# Altium PCB MCU_USB.PcbDoc
Units mil, origin at the board's own origin, x right, y up, seen from the top; angles counter-clockwise.
Board outline 1920.11 x 910.11 mil, 4 copper layers (Top Layer, VCC, GND, Bottom Layer), stack 30.634 mil thick; 36 components, 33 nets, 152 pads, 185 vias.
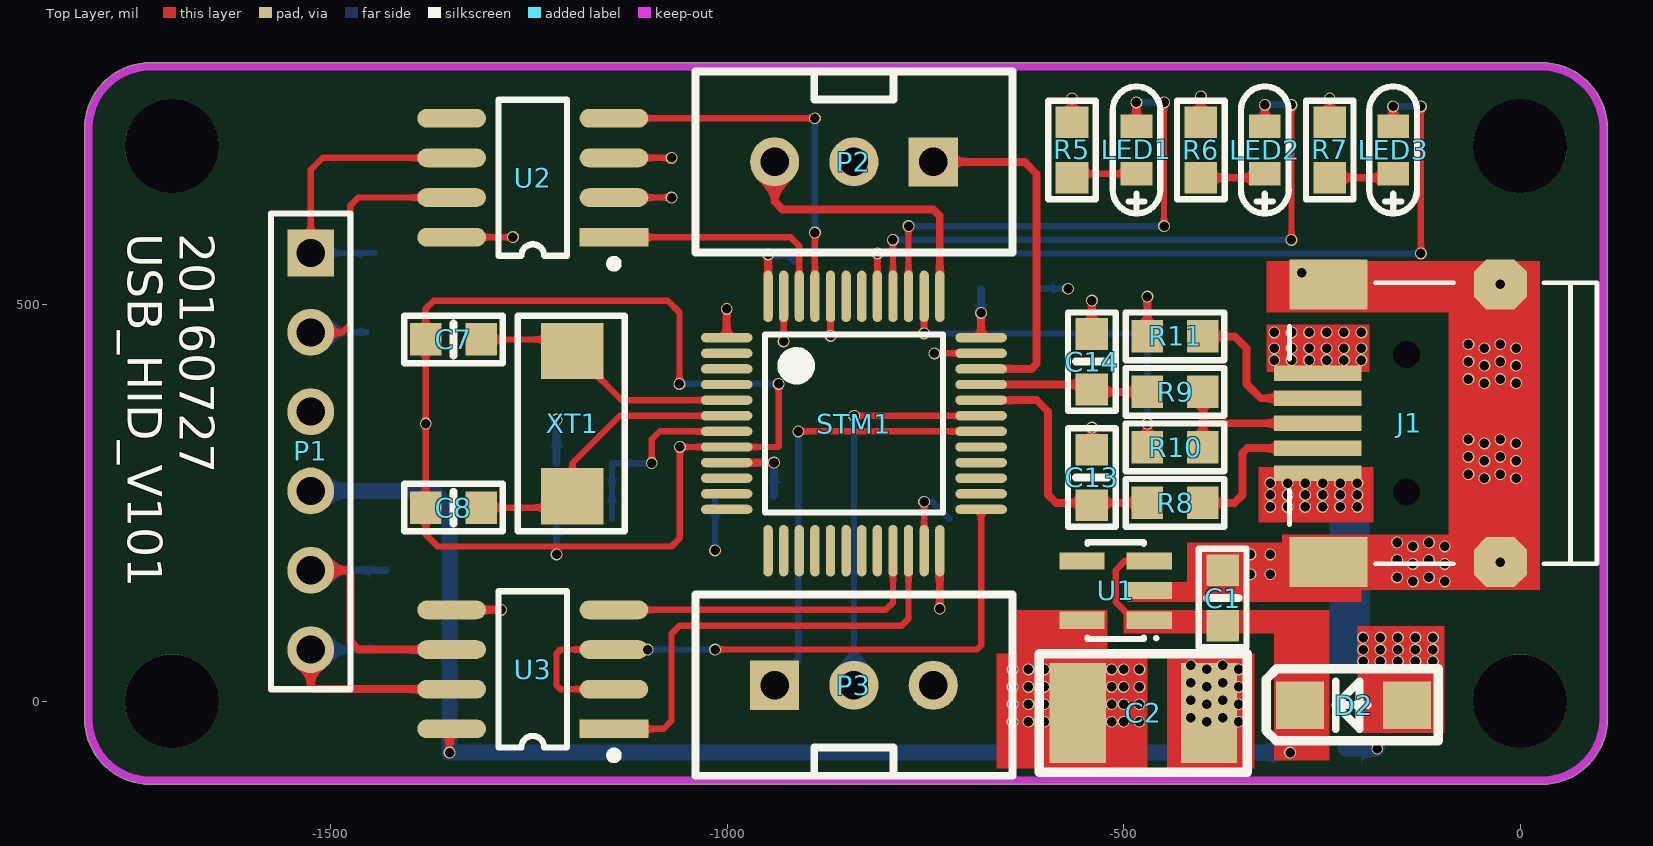
[diagram p0: Top Layer view]
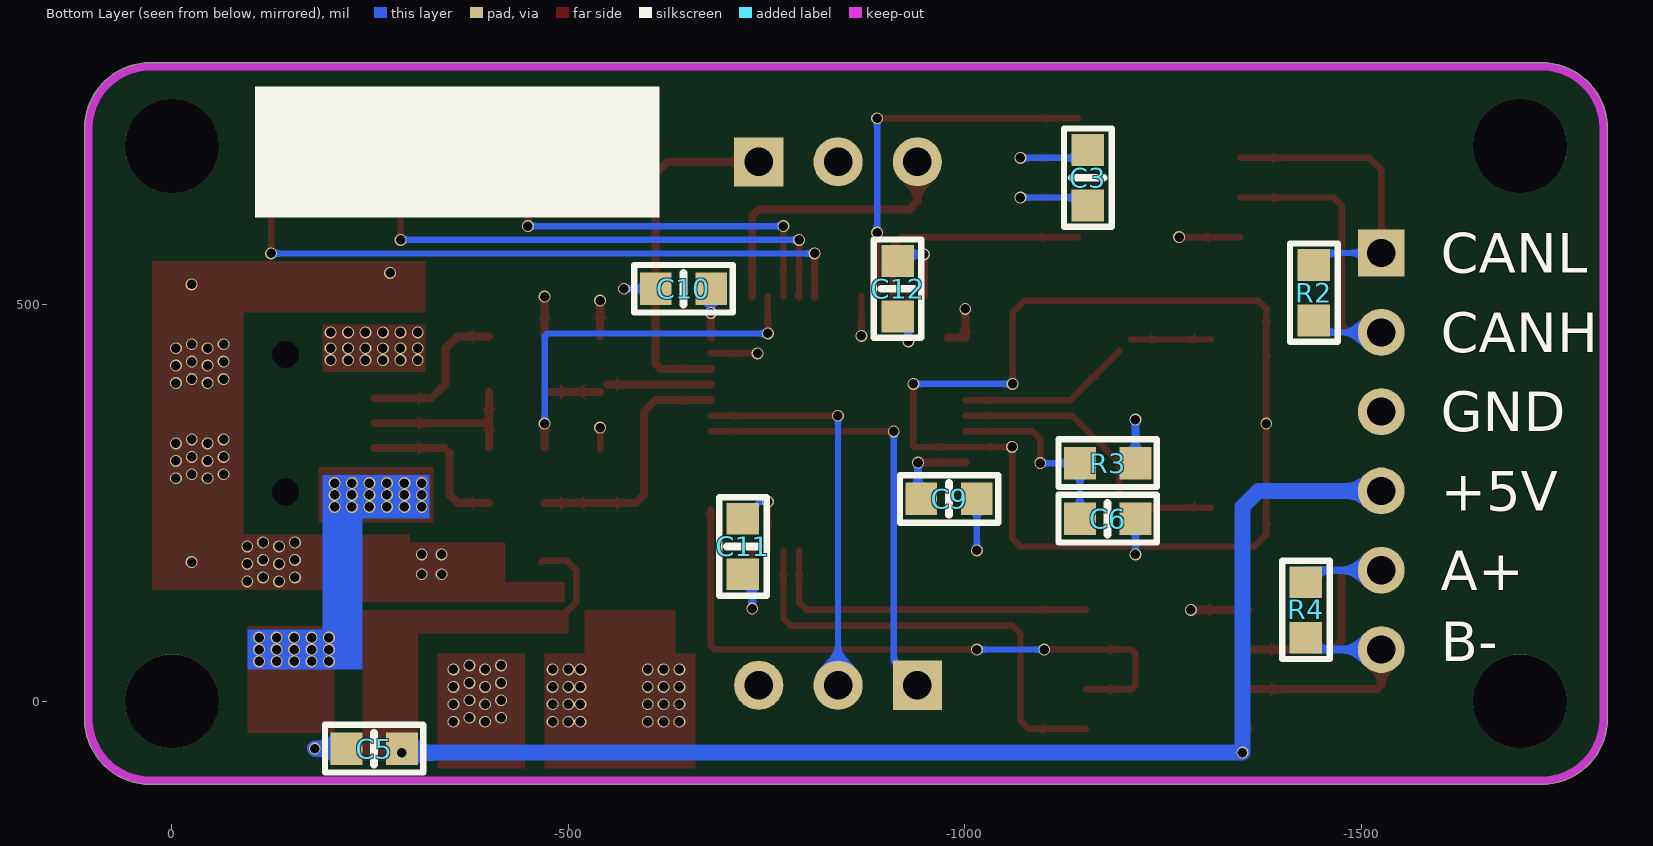
[diagram p1: Bottom Layer view, seen from below]
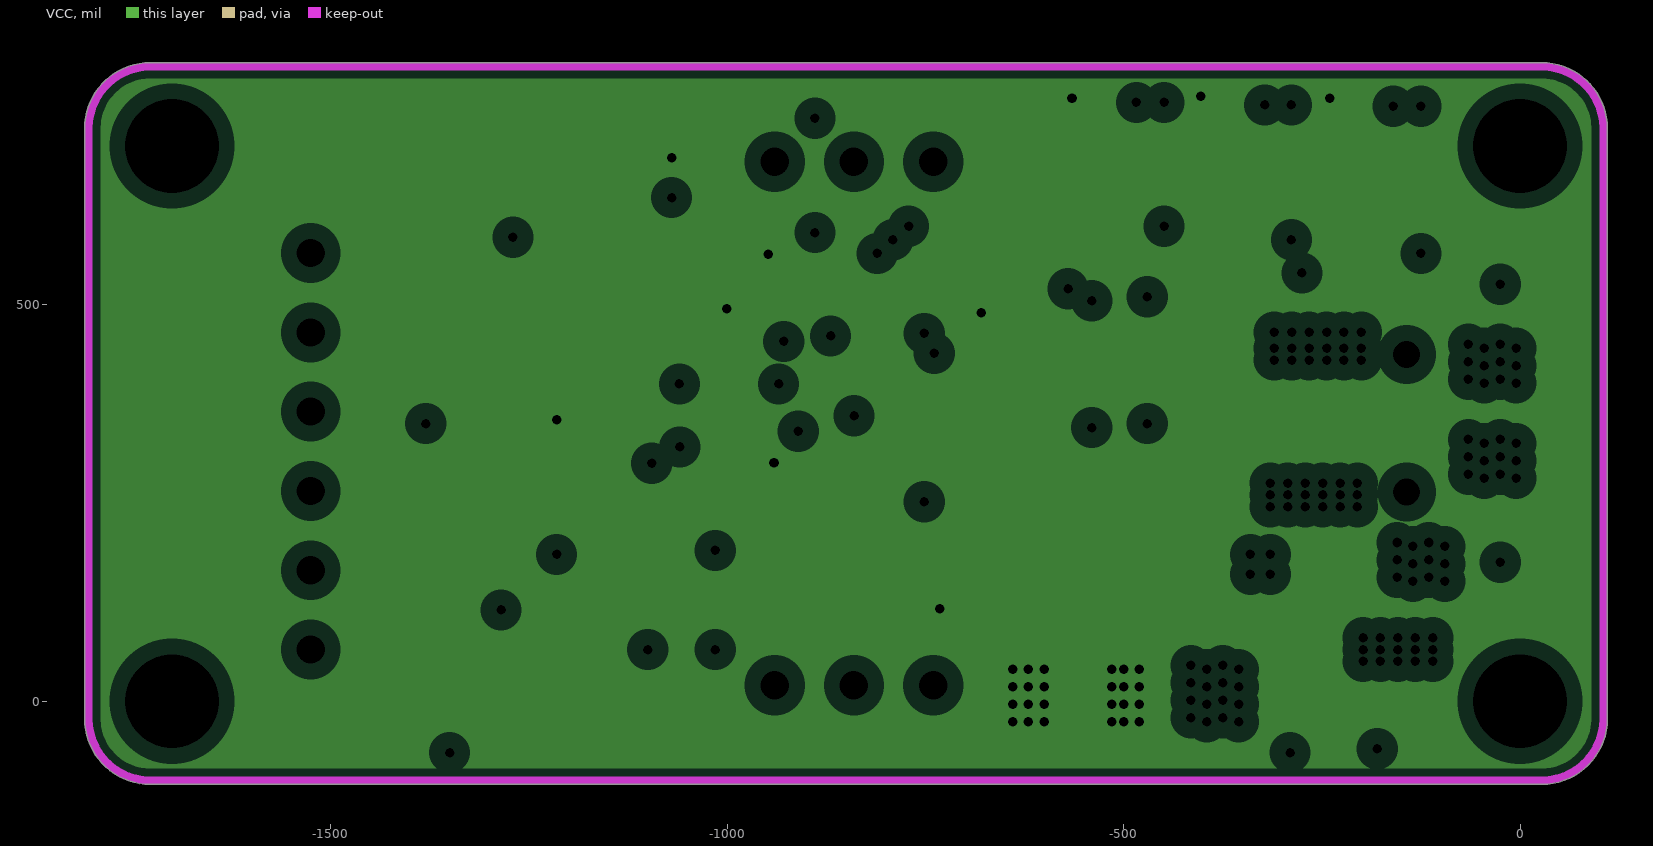
[diagram p2: VCC, clearances drawn from the general rule]
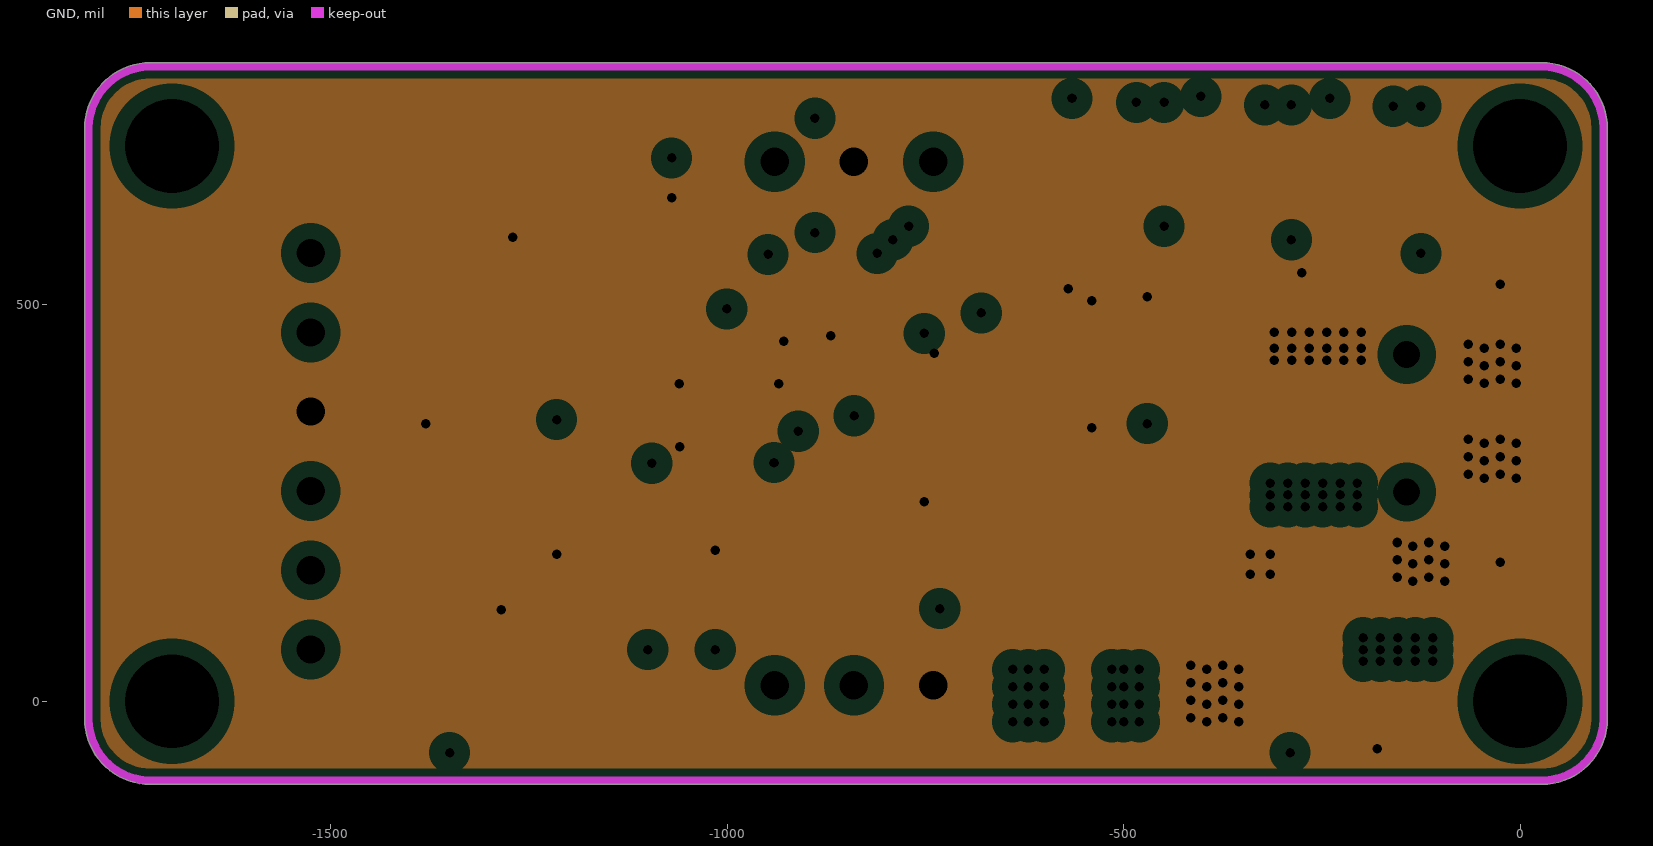
[diagram p3: GND, clearances drawn from the general rule]
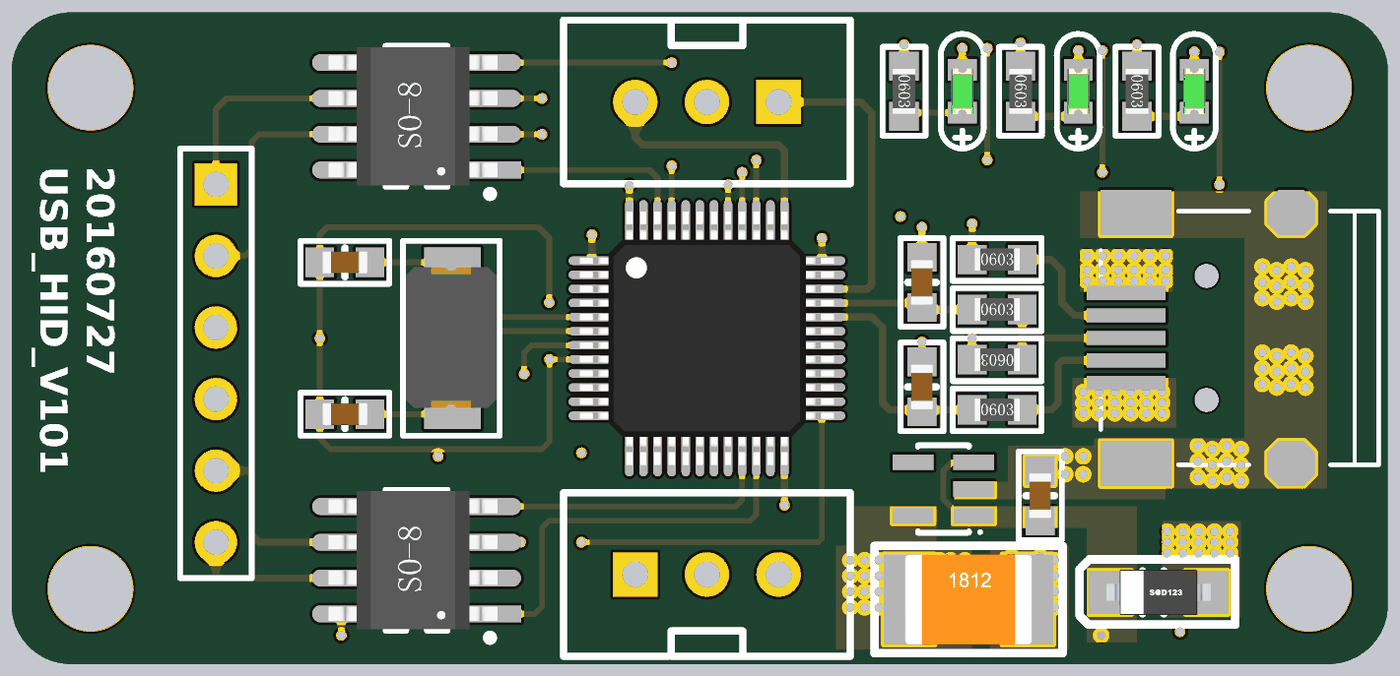
[diagram p4: 3D render of the assembled board from above, using the file's embedded part models]
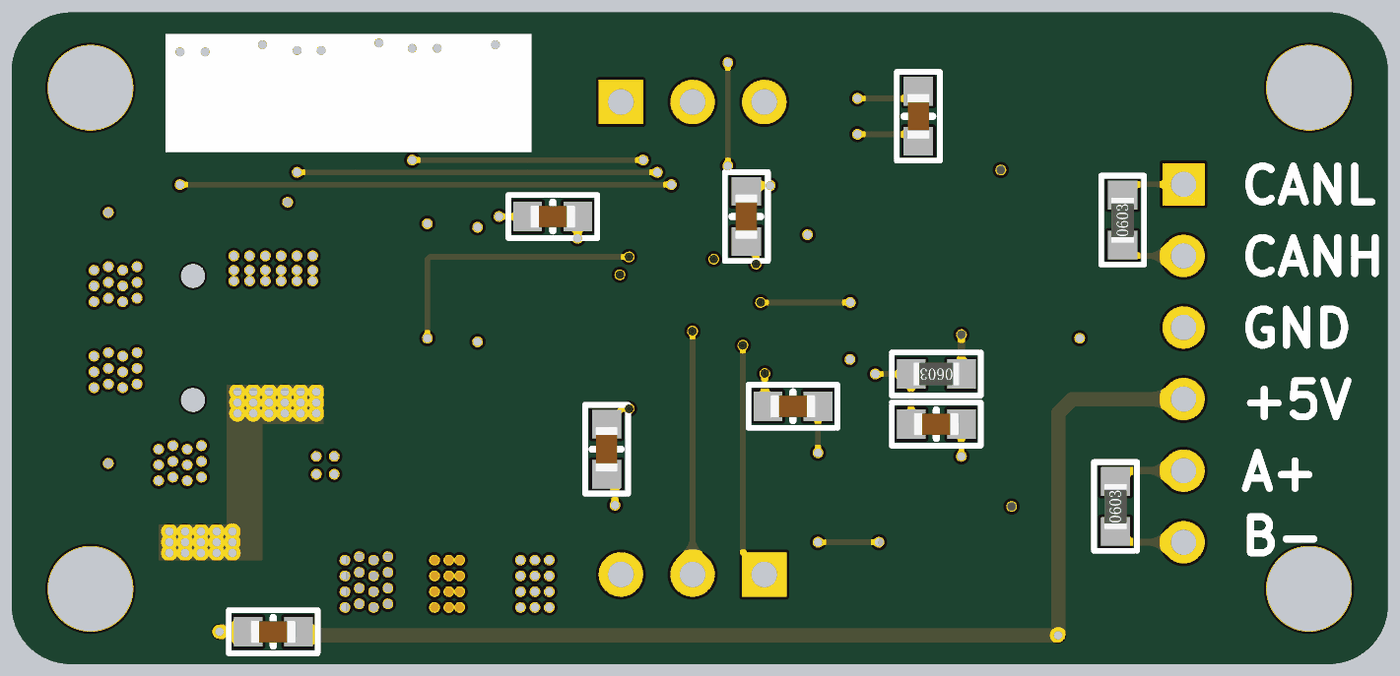
[diagram p5: 3D render of the assembled board from below, using the file's embedded part models]

## Layer stack, top to bottom
Top Solder: solder mask 0.4, Solder Resist, Dk 3.5
Top Layer: signal copper 1.4
Dielectric 1: core 10, FR-4, Dk 4.2
VCC: plane copper 1.417, net VCC_+3.3V
Dielectric 3: prepreg 5, Dk 4.2
GND: plane copper 1.417, net GND
Dielectric 2: core 10, Dk 4.2
Bottom Layer: signal copper 1.4
Bottom Solder: solder mask 0.4, Solder Resist, Dk 3.5

## Board outline
-1810.06,-22.5 cw(c-1805.04,-22.5) -1809.88,-21.17 cw(c-1805,-20) -1810.02,-20 -1810.02,721.86 cw(c-1805.04,722.5) -1810.06,722.5 cw(c-1727.5,722.5) -1727.5,805.06 cw(c-1727.5,800.04) -1726.87,805.02 27.5,805.02 cw(c27.5,722.46) 110.06,722.46 cw(c105.04,722.46) 110.01,721.83 110.01,-22.5 cw(c105,-22.5) 110.01,-22.53 ccw(c27.46,-22.5) 110.01,-22.5 110.01,-22.53 cw(c27.46,-22.5) 27.46,-105.06 cw(c27.46,-100.04) 26.83,-105.01 -1726.87,-105.01 cw(c-1727.5,-100.04) -1727.5,-105.06 cw(c-1727.5,-22.5)

## Design rules (kind name [scope] priority, off if disabled: settings)
Clearance [All] p1 off: gap=10
ComponentClearance [All] p1: gap=0 collisioncheckmode=3 verticalgap=0 showdistances=FALSE
HoleSize [All] p1: absolutevalues=TRUE maxlimit=500 minlimit=1 maxpercent=80.000 minpercent=20.000
HoleToHoleClearance [All] p1: gap=0 allowstackedmicrovias=TRUE
MinimumSolderMaskSliver [All] p1: minsoldermaskwidth=0
PlaneClearance [All] p1: clearance=20
PlaneConnect [All] p1: planeconnectstyle=Direct reliefexpansion=20 reliefentries=4 reliefconductorwidth=10 reliefairgap=10
PolygonConnect PolygonConnect_1 [IsVia vs InNet('GND')] p1 off: connectstyle=Direct reliefconductorwidth=10 reliefentries=4 polygonreliefangle="90 Angle" airgapwidth=10
PolygonConnect PolygonConnect_2 [All] p2: connectstyle=Direct reliefconductorwidth=10 reliefentries=4 polygonreliefangle="90 Angle" airgapwidth=10
RoutingVias [All] p1: holewidth=28 width=50 viastyle="Through Hole" minholewidth=28 minwidth=50 maxholewidth=28 maxwidth=50
SilkToSilkClearance [All] p1: silktosilkclearance=0
SilkToSolderMaskClearance [IsPad] p1: minsilkscreentomaskgap=0 clearancetoexposedcopper=TRUE
SolderMaskExpansion [All] p1: expansion=4
Width [All] p1: maxlimit=300 minlimit=8 preferedwidth=8
22 further rules are at their usual default settings.

## Components (designator, comment, footprint, x,y, rotation, side; value= is the part's Value field where it differs from the comment)
C1 "0.1uF" 0603C -375,130 r270 top
C2 "10uF" 1812C -475,-15 r0 top
C3 "0.1uF" 0603C -1155,660 r90 bottom
C5 "104" 0603C -255,-60 r180 bottom
C6 "Cap_0603" 0603C -1180,230 r0 bottom
C7 "Cap_0603" 0603C -1345,456 r0 top
C8 "Cap_0603" 0603C -1345,244 r0 top
C9 "Cap_0603" 0603C -980,255 r0 bottom
C10 "Cap_0603" 0603C -645,520 r180 bottom
C11 "Cap_0603" 0603C -720,195 r270 bottom
C12 "Cap_0603" 0603C -915,520 r90 bottom
C13 "Cap_0603" 0603C -540,282 r90 top
C14 "Cap_0603" 0603C -540,428 r90 top
D2 "Diode 1N4148" 1206D -210,-5 r180 top
J1 "USB_mini" USB -140,350.39 r270 top locked
LED1 "LED" LED-0603 -483.67,700 r90 top
LED2 "LED" LED-0603 -321.84,700 r90 top
LED3 "LED" LED-0603 -160,700 r90 top
P1 "Header 6" HDR1X6 -1525,565 r270 top
P2 "Header 3H" SIP3B -740,680 r180 top locked
P3 "Header 3H" SIP3B -940,20 r0 top locked
R2 "120R" 0603R -1435,515 r270 bottom
R3 "Res_0603" 0603R -1180,295 r180 bottom
R4 "120R" 0603R -1425,115 r270 bottom
R5 "10K" 0603R -560,695 r90 top
R6 "10K" 0603R -397.5,695 r90 top
R7 "10K" 0603R -235,695 r90 top
R8 "Res_0603" 0603R -435,255 r180 top
R9 "Res_0603" 0603R -435,395 r180 top
R10 "Res_0603" 0603R -435,315 r0 top
R11 "Res_0603" 0603R -435,465 r180 top
STM1 "STM32F103C" STM32F_48 -840,350 r0 top locked
U1 "SGM2019-3.3" SOT23-5 -510,140 r90 top
U2 "SN65HVD230" SOP8 -1250,660 r180 top
U3 "SN75LBC184" SOP8 -1250,40 r180 top
XT1 "XTAL_5032" 5032SMD -1195,350 r90 top

## Footprints (in the part's own frame and the unit in brackets; to place one, negate y for a bottom-side part, rotate by r counter-clockwise, add the part's x,y. Pads: shape width x height; smd on the part's side, far side on the other; paste and mask are expansions set on the pad)
0603C [mil]
  rect 40x41 smd: 1(-35,0) 2(35,0)
  silkscreen extent -62,-30 62,30, body extent -31,-16 32,16, height 24
0603R [mil]
  rect 40x41 smd: 1(35,5) 2(-35,5)
  silkscreen extent -62,-25 62,35, body extent -31,-11 31,21, height 18
1206D [mil] "1206-Diode"
  rect 60x60 smd: 1(-67.5,0) 2(67.5,0)
  silkscreen extent -107,-46 110,45, body extent -73,-31 73,32
1812C [mm]
  rect 1.8x3.2 smd: 1(-2.1,0) 2(2.1,0)
  silkscreen extent -3.33,-1.91 3.33,1.91, body extent -2.25,-1.6 2.25,1.6, height 1.6
5032SMD [mm]
  rect 1.8x2 smd: 1(2.328,0) 2(-2.328,0)
  silkscreen extent -3.45,-1.68 3.45,1.75, body extent -2.47,-1.55 2.53,1.65, height 1.35
HDR1X6 [mm] "Connector; Header; 6 Position"
  rect 1.5x1.5 hole 0.9: 1(0,0)
  round 1.5 hole 0.9: 2(2.54,0) 3(5.08,0) 4(7.62,0) 5(10.16,0) 6(12.7,0)
  silkscreen extent -1.27,-1.27 13.97,1.27
LED-0603 [mil]
  rect 30x40 smd: 1(-35,0) 2(25,0)
  silkscreen extent -85,-30 75,30, body extent -37,-16 27,16, height 24
SIP3B [mil]
  rect 62x62 hole 36: 1(0,0)
  round 62 hole 36: 2(100,0) 3(200,0)
  silkscreen extent -100,-114 300,114
SOP8 [mm]
  rect 2.2x0.6 smd: 1(-2.727,1.905)
  oval 2.2x0.6 smd: 2(-2.727,0.635) 3(-2.727,-0.635) 4(-2.727,-1.905) 5(2.473,-1.905) 6(2.473,-0.635) 7(2.473,0.635) 8(2.473,1.905)
  silkscreen extent -2.85,-2.5 0.97,2.88, body extent -3,-2.45 3,2.45, height 1.7
SOT23-5 [mm]
  rect 0.55x1.45 smd: 1(-0.966,-1.076) 2(-0.016,-1.076) 3(0.934,-1.076) 4(0.934,1.074) 5(-0.966,1.074)
  silkscreen extent -1.59,-1.35 1.53,0.9
STM32F_48 [mm] "TSQFP, 48-Leads, Body 9.0x9.0mm (max), Pitch 0.50mm, IPC Medium Density"
  oval 1.65x0.3 smd: 1(-4.075,2.75) 2(-4.075,2.25) 3(-4.075,1.75) 4(-4.075,1.25) 5(-4.075,0.75) 6(-4.075,0.25) 7(-4.075,-0.25) 8(-4.075,-0.75) 9(-4.075,-1.25) 10(-4.075,-1.75) 11(-4.075,-2.25) 12(-4.075,-2.75) 25(4.075,-2.75) 26(4.075,-2.25) 27(4.075,-1.75) 28(4.075,-1.25) 29(4.075,-0.75) 30(4.075,-0.25) 31(4.075,0.25) 32(4.075,0.75) 33(4.075,1.25) 34(4.075,1.75) 35(4.075,2.25) 36(4.075,2.75)
  oval 0.3x1.65 smd: 13(-2.75,-4.075) 14(-2.25,-4.075) 15(-1.75,-4.075) 16(-1.25,-4.075) 17(-0.75,-4.075) 18(-0.25,-4.075) 19(0.25,-4.075) 20(0.75,-4.075) 21(1.25,-4.075) 22(1.75,-4.075) 23(2.25,-4.075) 24(2.75,-4.075) 37(2.75,4.075) 38(2.25,4.075) 39(1.75,4.075) 40(1.25,4.075) 41(0.75,4.075) 42(0.25,4.075) 43(-0.25,4.075) 44(-0.75,4.075) 45(-1.25,4.075) 46(-1.75,4.075) 47(-2.25,4.075) 48(-2.75,4.075)
  silkscreen extent -2.85,-2.85 2.85,2.85, body extent -4.5,-4.5 4.5,4.5, height 1.59
USB [mm]
  round 0.8 hole 0.864 unplated: 0(-2.2,-0.075) 0(2.2,-0.075)
  rect 0.5x2.8 smd: 1(1.6,-2.925) 2(0.8,-2.925) 3(0,-2.925) 4(-0.8,-2.925) 5(-1.6,-2.925)
  rect 1.6x2.5 smd: MH1(4.45,-2.575) MH2(-4.45,-2.575)
  oct 1.6x1.7 smd: MH3(4.45,2.925) MH4(-4.45,2.925)
  silkscreen extent -4.5,-3.82 4.5,6.02

## Part data
C1 C3: library part Cap, "Capacitor"
C2: library part "Cap Pol", "Polarized Capacitor (Radial)"
C5: library part 0603C
C6 C7 C8 C9 C10 C11 C12 C13 C14: "Capacitor"
D2: "High Conductance Fast Diode"
J1: library part 0481900001, "USB On-The-Go (OTG) Mini-B Receptacle, Right Angle, SMT, 0.80mm (.031\") Pitch, Solder Tabs with Back Cover, Recessed Type"
LED1 LED2 LED3: "Typical INFRARED GaAs LED"
P1: "Header, 6-Pin"
P2 P3: "Header, 3-Pin, Right Angle"
R2 R4: library part RES2A
R3 R8 R9 R10 R11: "Resistor"
R5 R6 R7: library part Res2, "Resistor"
STM1: "MCU"
U1: library part SGM2019
U2: library part SN65HVD230D
XT1: "Crystal Oscillator"

## Free pads (board coordinates)
  round 118.11 hole 118.11: 0(-1700,0) 0(-1700,700) 0(0,0) 0(0,700)

## Via types
v1: diameter 15, hole 12, Top Layer to Bottom Layer, 185 vias

## Nets (pads, with @x,y where several pads share a name; then routed paths per layer and width w, separated by ;. In a path a pad name is that pad's centre, name@x,y a point inside that pad or via, vN(x,y) a via of type N, cw(c..) or ccw(c..) an arc to the next point about the centre after c; other vN are vias at no path point)
485_DIR: STM1.25 U3.2 U3.3 | length 815.5
  Top Layer w8: U3.2@-1152.64,15 -1210,15 -1215,20 -1215,60 -1210,65 -1152.64,65 v1(-1100,65) ; v1(-1015,65) -685,65 -679.57,70.43 STM1.25
  Bottom Layer w8: v1(-1100,65) v1(-1015,65)
A+: P1.5 R4.2 U3.6 | length 363.9
  Top Layer w10: P1.5 -1480,165 -1475,160 -1475,75 -1465,65 U3.6
  Bottom Layer w10: P1.5 R4.2@-1430,165
B-: P1.6 R4.1 U3.7 | length 309.7
  Top Layer w10: P1.6 -1525,20 -1520,15 U3.7
  Bottom Layer w10: P1.6 R4.1@-1440,65
CAN_RXD1: STM1.45 U2.4 | length 478
  Top Layer w8: U2.4 v1(-889.21,735) ; STM1.45 v1(-889.21,590.79)
  Bottom Layer w8: v1(-889.21,590.79) v1(-889.21,735)
CAN_TXD1: STM1.46 U2.1 | length 301.8
  Top Layer w8: U2.1 -920,585 -908.9,573.9 STM1.46
CANH: P1.2 R2.1 U2.7 | length 405.9
  Top Layer w8: P1.2 -1485,465 -1475,475 -1475,625 -1465,635 U2.7
  Bottom Layer w8: P1.2 R2.1@-1455,465
CANL: P1.1 R2.2 U2.6 | length 368.9
  Top Layer w8: P1.1 -1525,670 -1510,685 U2.6
  Bottom Layer w8: P1.1 R2.2@-1445,565
D+: C14.1 R9.1 STM1.33 | length 200.4
  Top Layer w10: STM1.33 C14.1@-549.21,399.21 ; C14.1@-540,390 R9.1
D-: C13.1 R8.1 STM1.32 | length 324.7
  Top Layer w10: STM1.32 -609.53,379.53 -595,365 -595,260 -585,250 -540,250 R8.1
GND: C1.1 C2.2 C3.1 C5.1 C6.1 C7.1 C8.1 C9.1 C10.1 C11.1 C12.1 C13.2 C14.2 J1.5 J1.MH1 J1.MH2 J1.MH3 J1.MH4 P1.3 P2.2 P3.3 R11.1 STM1.8 STM1.23 STM1.35 STM1.44 STM1.47 U1.2 U2.2 U2.8 U3.5 | length 2381.3
  Top Layer w8: U2.8 v1(-1270,585) ; U2.2 v1(-1070,635) ; v1(-1060,400) -1060,490 -1075,505 -1370,505 -1380,495 C7.1 C8.1 -1380,210 -1365,195 -1070,195 -1059.53,205.47 v1(-1059.53,320.47) STM1.8 -935.47,320.47 -935,320.94 v1(-935,400) ; v1(-928.58,453.58) STM1.47 ; v1(-869.53,460.47) STM1.44 ; STM1.23 v1(-751.42,251.42) ; v1(-738.58,438.58) STM1.35 ; C13.2 v1(-540,345)
  Top Layer w10: U3.5@-1357.36,115 v1(-1285,115) ; C14.2@-540,460 v1(-540,505) ; R11.1 v1(-470,510)
  Bottom Layer w8: v1(-1215,185) C6.1 ; C3.1@-1150,635 v1(-1070,635) ; v1(-1060,400) v1(-935,400) ; v1(-1015,190) C9.1 ; v1(-928.58,453.58) C12.1@-928.58,471.42 ; v1(-751.42,251.42) -741.42,251.42 C11.1 ; C10.1 v1(-570,520)
  Bottom Layer w20: C5.1 v1(-180,-60)
  other v1: -395,-26 -355,-26 -415,-21 -375,-21 -395,-4 -355,-4 -415,1 -375,1 -395,18 -355,18 -415,23 -375,23 -395,40 -355,40 -415,45 -375,45 -135,151 -95,151 -155,156 -115,156 -340,160 -315,160 -135,173 -95,173 -24.84,175.2 -155,178 -115,178 -340,185 -315,185 -135,195 -95,195 -155,200 -115,200 -45,281 -5,281 -65,286 -25,286 -45,303 -5,303 -65,308 -25,308 -45,325 -5,325 -65,330 -25,330 -1380,350 -45,401 -5,401 -65,406 -25,406 -45,423 -5,423 -65,428 -25,428 -310,430 -288,430 -266,430 -244,430 -222,430 -200,430 -310,445 -288,445 -266,445 -244,445 -222,445 -200,445 -45,445 -5,445 -65,450 -25,450 -310,465 -288,465 -266,465 -244,465 -222,465 -200,465 -24.84,525.59 -275,540
LED_BLUE: LED3.2 STM1.41 | length 985.7
  Top Layer w8: STM1.41 v1(-810.47,564.53) ; v1(-125,564.53) v1(-125,750)
  Top Layer w10: STM1.41 STM1.41@-810,510.91 ; LED3.2 v1(-160,750)
  Bottom Layer w8: v1(-810.47,564.53) v1(-125,564.53) ; v1(-160,750) v1(-125,750)
LED_GREEN: LED2.2 STM1.40 | length 806.1
  Top Layer w8: STM1.40 v1(-790.79,581.71) v1@-790.79,584.21 ; v1(-288.29,581.71) v1@-288.29,750
  Top Layer w10: STM1.40 STM1.40@-790,511.22 ; LED2.2 v1(-321.84,751.84)
  Bottom Layer w8: v1(-790.79,581.71) v1(-288.29,581.71) ; v1(-321.84,751.84) v1(-288.29,751.84)
LED_RED: LED1.2 STM1.39 | length 631.5
  Top Layer w8: STM1.39 v1(-771.1,598.9) ; v1(-448.9,598.9) v1(-448.9,755)
  Top Layer w10: LED1.2 v1(-483.67,755)
  Bottom Layer w8: v1(-771.1,598.9) v1(-448.9,598.9) ; v1(-483.67,755) v1(-448.9,755)
NetC4_2: U1.4
NetLED1_1: LED1.1 R5.2 | length 83.4
  Top Layer w8: R5.2 -560,665 LED1.1
NetLED2_1: LED2.1 R6.2 | length 75.7
  Top Layer w10: R6.2 LED2.1@-326.84,660
NetLED3_1: LED3.1 R7.2 | length 75
  Top Layer w10: R7.2 LED3.1@-165,660
RD+: R10.2 STM1.38 | length 469.8
  Top Layer w8: v1(-751.42,463.58) STM1.38
  Top Layer w10: R10.2 v1(-470,350)
  Bottom Layer w8: v1(-751.42,463.58) -473.58,463.58 -470,460 v1(-470,350)
RST: C6.2 R3.2 STM1.7 | length 248.8
  Top Layer w8: v1(-1095,300) -1095,330 -1084.84,340.16 STM1.7
  Bottom Layer w8: C6.2 R3.2 v1(-1095,300)
RXD1: P3.2 STM1.31 | length 500.2
  Top Layer w8: v1(-839.84,359.84) STM1.31
  Bottom Layer w8: P3.2 -839.84,20.16 v1(-839.84,359.84)
RXD3: STM1.22 U3.1 | length 589.2
  Top Layer w8: U3.1@-1152.64,-35 -1080,-35 -1070,-25 -1070,85 -1060,95 -780,95 -771.1,103.9 STM1.22
SWCLK: P2.3 STM1.37 | length 367.1
  Top Layer w10: P2.3 -940,630 -930,620 -740,620 -731.73,611.73 STM1.37
SWDIO: P2.1 STM1.34 | length 448.3
  Top Layer w10: P2.1 -625,680 -610,665 -610,425 -616.1,418.9 STM1.34
TXD1: P3.1 STM1.30 | length 563.1
  Top Layer w8: v1(-910.16,340.16) STM1.30
  Bottom Layer w8: P3.1 -910.16,49.84 v1(-910.16,340.16)
TXD3: STM1.21 U3.4 | length 431
  Top Layer w8: U3.4@-1152.64,115 -800,115 -790.79,124.21 STM1.21
USB_DM: J1.2 R8.2 | length 204.3
  Top Layer w10: R8.2 -360,250 -350,260 -350,312.8 -343.9,318.9 J1.2
USB_DP: J1.3 R9.2 R10.1 | length 216.8
  Top Layer w10: R10.1 -400,355 ; R9.2 -400,355 ; J1.3 -395.39,350.39 -400,355
USB_ID: J1.4 R11.2 | length 203.6
  Top Layer w10: R11.2 -360,460 -345,445 -345,400 -326.89,381.89 J1.4
USB_VBUS: D2.1 J1.1
  other v1: -198,50 -176,50 -154,50 -132,50 -110,50 -198,65 -176,65 -154,65 -132,65 -110,65 -198,80 -176,80 -154,80 -132,80 -110,80 -315,245 -293,245 -271,245 -249,245 -227,245 -205,245 -315,260 -293,260 -271,260 -249,260 -227,260 -205,260 -315,275 -293,275 -271,275 -249,275 -227,275 -205,275
VCC_+3.3V: C2.1 C3.2 C9.2 C10.2 C11.2 C12.2 R3.1 R5.1 R6.1 R7.1 STM1.1 STM1.9 STM1.24 STM1.36 STM1.48 U1.5 U2.3 | length 720
  Top Layer w8: U2.3 v1(-1070,685)
  Top Layer w10: STM1.9 v1(-940.79,300.79) ; v1(-1000.43,494.57) STM1.1 STM1.1@-978.27,458.27 ; STM1.48 v1(-948.27,563.27) ; v1(-731.73,116.73) STM1.24 ; STM1.36 v1(-679.57,489.57) ; R5.1 v1(-565,760) ; R6.1 v1(-402.5,762.5) ; R7.1 v1(-240,760)
  Bottom Layer w8: C3.2@-1155,685 v1(-1070,685)
  Bottom Layer w10: R3.1 v1(-1215,355) ; v1(-948.27,563.27) -923.27,563.27 C12.2 ; C9.2@-940.79,259.21 v1(-940.79,300.79) ; v1(-731.73,116.73) C11.2@-731.73,148.27 ; v1(-679.57,489.57) C10.2@-679.57,519.57
  other v1: -640,-26 -620,-26 -600,-26 -515,-26 -500,-26 -480,-26 -640,-4 -620,-4 -600,-4 -515,-4 -500,-4 -480,-4 -640,18 -620,18 -600,18 -515,18 -500,18 -480,18 -640,40 -620,40 -600,40 -515,40 -500,40 -480,40
VCC_+5V: C1.2 C5.2 D2.2 P1.4 U1.1 U1.3 U3.8 | length 1728
  Top Layer w8: U1.1 -486.97,101.97 -510,125 -510,165 -498.23,176.77 U1.3 U1.3@-465.87,175
  Top Layer w10: U3.8@-1357.36,-35 -1350,-42.36 v1(-1350,-65)
  Bottom Layer w20: P1.4 -1370,265 -1350,245 v1(-1350,-65) v1(-290,-65)
X1: C7.2 STM1.5 XT1.1 | length 321
  Top Layer w8: C7.2 XT1.1@-1209.34,456 ; XT1.1 -1132.87,379.53 STM1.5
X2: C8.2 STM1.6 XT1.2 | length 361.7
  Top Layer w8: C8.2 XT1.2@-1209.34,244 ; XT1.2 -1195,300 -1135.16,359.84 STM1.6
pads on no net: J1.0 STM1.2 STM1.3 STM1.4 STM1.10 STM1.11 STM1.12 STM1.13 STM1.14 STM1.15 STM1.16 STM1.17 STM1.18 STM1.19 STM1.20 STM1.26 STM1.27 STM1.28 STM1.29 STM1.42 STM1.43 U2.5

## Polygon pours and split planes (outlines as drawn)
VCC_+3.3V on VCC (split plane): 90.03,722.93 89.98,722.46 89.96,722.46 90.02,723.08
VCC_+3.3V on VCC (split plane): -1727.5,784.98 -1727.5,784.96 -1727.39,784.97 -1726.87,784.92 27.5,784.92 28.12,784.98 34.5,784.62 41.42,783.44 48.16,781.5 54.64,778.82 60.78,775.43 66.5,771.37 71.73,766.69 76.41,761.46 80.47,755.74 83.86,749.6 86.54,743.12 88.49,736.38 89.66,729.46 89.95,724.38 89.53,724.44 88.71,722.46 89.96,722.46 89.97,722.35 89.92,721.83 89.92,-22.4 88.72,-22.39 88.67,-22.5 89.92,-22.5 89.92,-22.53 89.98,-23.14 89.62,-29.5 88.44,-36.42 86.5,-43.16 83.82,-49.64 80.43,-55.78 76.37,-61.5 71.69,-66.73 66.46,-71.41 60.74,-75.47 54.6,-78.86 48.12,-81.54 41.38,-83.49 34.46,-84.66 29.38,-84.95 29.44,-84.53 27.46,-83.71 27.46,-84.96 28.08,-85.02 27.93,-85.03 27.46,-84.98 27.46,-84.96 27.35,-84.97 26.83,-84.92 -1726.87,-84.92 -1727.39,-84.97 -1727.5,-84.96 -1727.5,-84.98 -1727.97,-85.03 -1728.12,-85.02 -1727.5,-84.96 -1727.5,-83.71 -1729.48,-84.53 -1729.43,-84.95 -1734.5,-84.66 -1741.42,-83.49 -1748.16,-81.54 -1754.64,-78.86 -1760.78,-75.47 -1766.5,-71.41 -1771.73,-66.73 -1776.41,-61.5 -1780.47,-55.78 -1783.86,-49.64 -1786.54,-43.16 -1788.49,-36.42 -1789.66,-29.5 -1789.89,-25.35 -1788.71,-22.5 -1789.91,-22.5 -1789.78,-21.17 -1789.89,-20 -1788.67,-20 -1789.92,-16.99 -1789.92,721.86 -1789.97,722.39 -1789.96,722.5 -1788.71,722.5 -1789.53,724.48 -1789.95,724.43 -1789.66,729.5 -1788.49,736.42 -1786.54,743.16 -1783.86,749.64 -1780.47,755.78 -1776.41,761.5 -1771.73,766.73 -1766.5,771.41 -1760.78,775.47 -1754.64,778.86 -1748.16,781.54 -1741.42,783.49 -1734.5,784.66 -1729.43,784.95 -1729.48,784.53 -1727.5,783.71 -1727.5,784.96 -1728.12,785.02 -1727.97,785.03
VCC_+3.3V on VCC (split plane): -1789.96,722.5 -1789.98,722.5 -1790.03,722.97 -1790.02,723.12
GND on GND (split plane): 90.03,722.93 89.98,722.46 89.96,722.46 90.02,723.08
GND on GND (split plane): -1727.5,784.98 -1727.5,784.96 -1727.39,784.97 -1726.87,784.92 27.5,784.92 28.12,784.98 34.5,784.62 41.42,783.44 48.16,781.5 54.64,778.82 60.78,775.43 66.5,771.37 71.73,766.69 76.41,761.46 80.47,755.74 83.86,749.6 86.54,743.12 88.49,736.38 89.66,729.46 89.95,724.38 89.53,724.44 88.71,722.46 89.96,722.46 89.97,722.35 89.92,721.83 89.92,-22.4 88.72,-22.39 88.67,-22.5 89.92,-22.5 89.92,-22.53 89.98,-23.14 89.62,-29.5 88.44,-36.42 86.5,-43.16 83.82,-49.64 80.43,-55.78 76.37,-61.5 71.69,-66.73 66.46,-71.41 60.74,-75.47 54.6,-78.86 48.12,-81.54 41.38,-83.49 34.46,-84.66 29.38,-84.95 29.44,-84.53 27.46,-83.71 27.46,-84.96 28.08,-85.02 27.93,-85.03 27.46,-84.98 27.46,-84.96 27.35,-84.97 26.83,-84.92 -1726.87,-84.92 -1727.39,-84.97 -1727.5,-84.96 -1727.5,-84.98 -1727.97,-85.03 -1728.12,-85.02 -1727.5,-84.96 -1727.5,-83.71 -1729.48,-84.53 -1729.43,-84.95 -1734.5,-84.66 -1741.42,-83.49 -1748.16,-81.54 -1754.64,-78.86 -1760.78,-75.47 -1766.5,-71.41 -1771.73,-66.73 -1776.41,-61.5 -1780.47,-55.78 -1783.86,-49.64 -1786.54,-43.16 -1788.49,-36.42 -1789.66,-29.5 -1789.89,-25.35 -1788.71,-22.5 -1789.91,-22.5 -1789.78,-21.17 -1789.89,-20 -1788.67,-20 -1789.92,-16.99 -1789.92,721.86 -1789.97,722.39 -1789.96,722.5 -1788.71,722.5 -1789.53,724.48 -1789.95,724.43 -1789.66,729.5 -1788.49,736.42 -1786.54,743.16 -1783.86,749.64 -1780.47,755.78 -1776.41,761.5 -1771.73,766.73 -1766.5,771.41 -1760.78,775.47 -1754.64,778.86 -1748.16,781.54 -1741.42,783.49 -1734.5,784.66 -1729.43,784.95 -1729.48,784.53 -1727.5,783.71 -1727.5,784.96 -1728.12,785.02 -1727.97,785.03
GND on GND (split plane): -1789.96,722.5 -1789.98,722.5 -1790.03,722.97 -1790.02,723.12

## Keep-outs
Keep-Out Layer:
  lines w10: -1805.04,-22.5 ccw(c-1727.5,-22.5) -1727.5,-100.04 ; -1805.04,722.5 cw(c-1727.5,722.5) -1727.5,800.04 ; -1805,-20 -1805,722.5 ; -1727.5,-100 27.46,-100 ; -1727.5,800 27.5,800 cw(c27.5,722.46) 105.04,722.46 ; 27.46,-100.04 ccw(c27.46,-22.5) 105,-22.5 105,722.46

## Other copper
Top Layer:
  rectangle net VCC_+3.3V: -660,-85 -470,60
  rectangle net GND: -445,-85 -335,60
  rectangle net VCC_+3.3V: -635,55 -520,115
  rectangle net VCC_+5V: -500,85 -240,115
  rectangle net VCC_+5V: -310,-75 -240,110
  rectangle net GND: -320,415 -190,475
  rectangle net GND: -320,490 25,555
  rectangle net GND: -90,140 25,555
  rectangle net GND: -300,140 25,210
  rectangle net USB_VBUS: -330,225 -185,295
  rectangle net USB_VBUS: -205,-40 -95,95
  rectangle net GND: -420,140 -245,200
  rectangle net GND: -495,125 -200,150
Bottom Layer:
  rectangle net USB_VBUS: -325,230 -190,285
  rectangle net USB_VBUS: -240,40 -190,270
  rectangle net USB_VBUS: -230,40 -95,90

## Silkscreen, mask and mechanical layers (free items; w line width, h text height)
Top Overlay:
  text "USB_HID_V101" at -1770,590 h75 r270
  text "20160727" at -1705,590 h75 r270
Bottom Overlay:
  rectangle: -615,610 -105,775
  text "CANL" at -1600,540 h50
  text "CANH" at -1600,440 h50
  text "GND" at -1600,340 h50
  text "+5V" at -1600,240 h50
  text "A+" at -1600,140 h50
  text "B-" at -1600,50 h50